# Altium PCB PCB2.PcbDoc
Units mm, origin at the board's own origin, x right, y up, seen from the top; angles counter-clockwise.
Board outline 26.67 x 61.52 mm, 2 copper layers (Top Layer, Bottom Layer); 24 components, 27 nets, 97 pads, 6 vias.
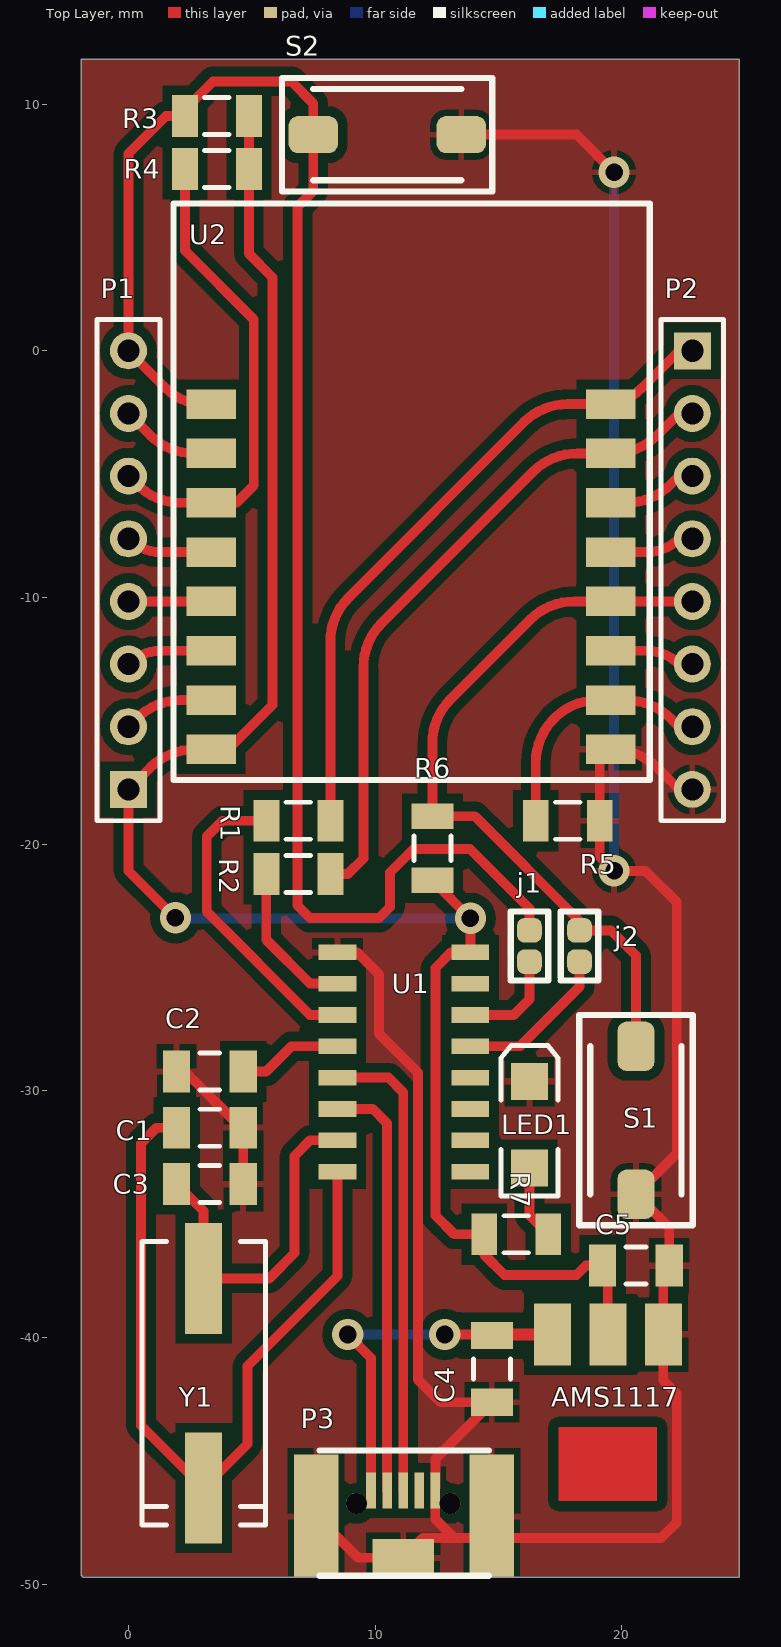
[diagram p0: Top Layer view]
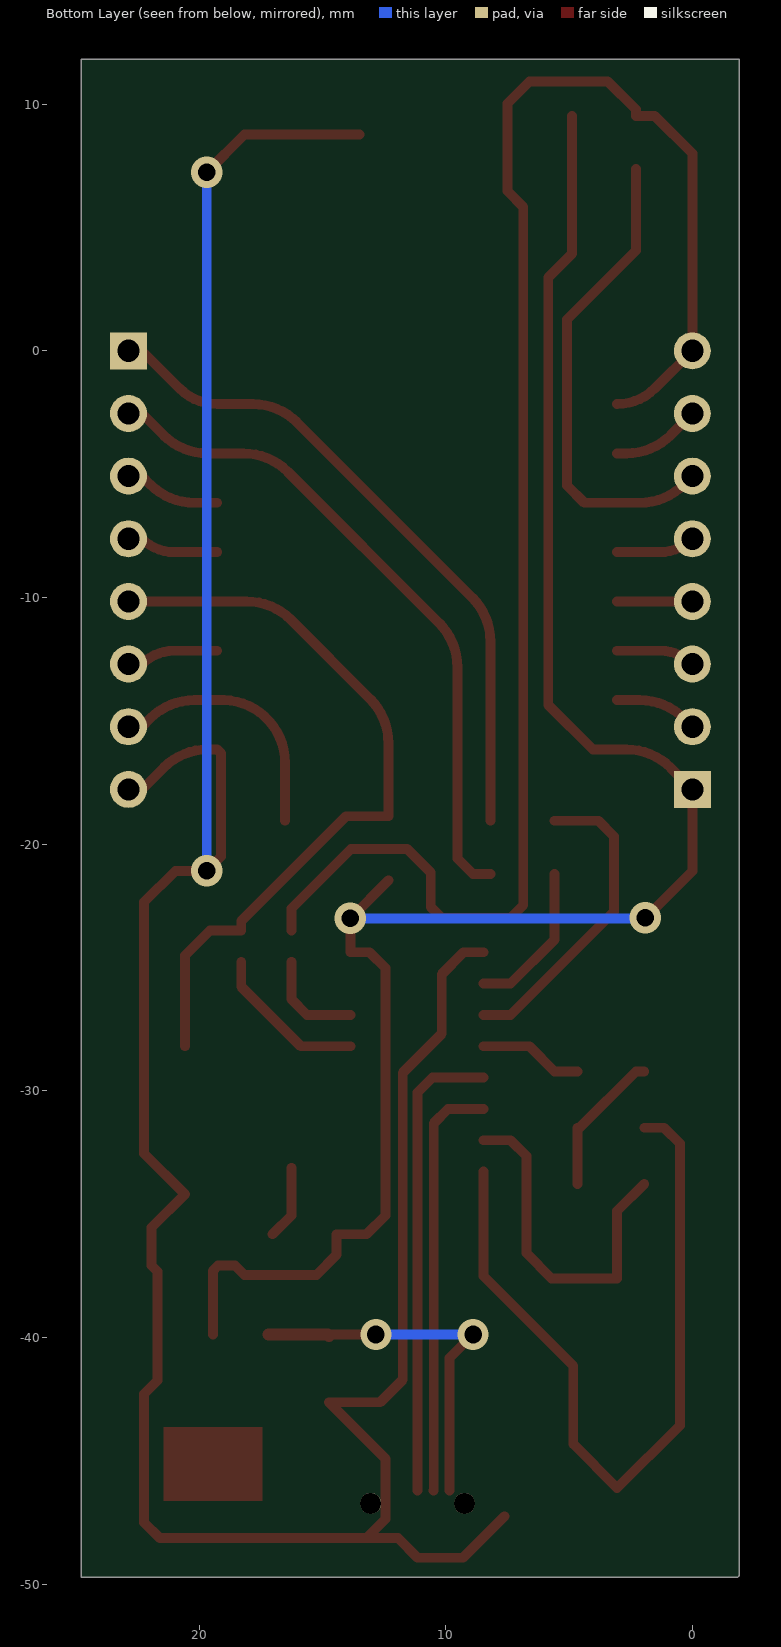
[diagram p1: Bottom Layer view, seen from below]

## Layer stack, top to bottom
Top Solder: solder mask 0.0102, Solder Resist, Dk 3.5
Top Layer: signal copper 0.0356
Dielectric 1: dielectric 0.32, FR-4, Dk 4.8
Bottom Layer: signal copper 0.0356
Bottom Solder: solder mask 0.0102, Solder Resist, Dk 3.5

## Board outline
-1.849,-49.713 -1.905,-49.657 -1.905,11.811 24.765,11.811 24.765,-49.713

## Design rules (kind name [scope] priority, off if disabled: settings)
Clearance [All] p1: gap=0.4 ignorepadtopadclearanceinfootprint=FALSE
PolygonConnect [All] p1: connectstyle=Relief reliefconductorwidth=0.254 reliefentries=4 polygonreliefangle="90 Angle" airgapwidth=0.254
RoutingVias [All] p1: holewidth=0.711 width=1.27 viastyle="Through Hole" minholewidth=0.711 minwidth=1.27 maxholewidth=0.711 maxwidth=1.27
SolderMaskExpansion [All] p1: expansion=0.102
Width [All] p1: maxlimit=3 minlimit=0.254 preferedwidth=1.5
30 further rules are at their usual default settings.

## Components (designator, comment, footprint, x,y, rotation, side; value= is the part's Value field where it differs from the comment)
AMS1117 "AMS1117" SOT-223-3 22.681,-39.128 r180 top
C1 "Cap Semi" C1206 3.302,-31.496 r180 top value=22pF
C2 "Cap Semi" C1206 3.302,-29.21 r0 top value=22pF
C3 "Cap Semi" C1206 3.302,-33.782 r180 top value=22pF
C4 "Cap Semi" C1206 14.732,-41.275 r90 top value=22pF
C5 "Cap Semi" C1206 20.574,-37.084 r180 top value=22pF
j1 "j1" jmp 16.256,-24.765 r90 top
j2 "j1" jmp 18.288,-24.765 r90 top
LED1 "Red" "LED SMD 1206" 16.256,-31.369 r90 top
P1 "Header 8" HDR1X8 0,-17.78 r90 top
P2 "Header 8" HDR1X8 22.86,0 r270 top
P3 "USB mini" microUSB 12.192,-48.133 r0 top
R1 "1K" "RES 1206 (3216X08L)" 5.588,-19.05 r0 top
R2 "1K" "RES 1206 (3216X08L)" 5.588,-21.209 r0 top
R3 "1K" "RES 1206 (3216X08L)" 4.882,9.525 r180 top
R4 "1K" "RES 1206 (3216X08L)" 4.882,7.366 r180 top
R5 "1K" "RES 1206 (3216X08L)" 19.106,-19.05 r180 top
R6 "1K" "RES 1206 (3216X08L)" 12.319,-18.867 r270 top
R7 "1K" "RES 1206 (3216X08L)" 17.018,-35.814 r180 top
S1 "Flash" 3*6*2.5BTN 20.574,-31.115 r270 top
S2 "Flash" 3*6*2.5BTN 10.414,8.763 r0 top
U1 "CH340G" sop16 11.158,-29.21 r0 top
U2 "ESP8266_ESP-12" ESP-12s 11.984,-3.554 r0 top
Y1 "12MHz" "Crystal SMD" 3.048,-42.418 r90 top

## Footprints (in the part's own frame and the unit in brackets; to place one, negate y for a bottom-side part, rotate by r counter-clockwise, add the part's x,y. Pads: shape width x height; smd on the part's side, far side on the other; paste and mask are expansions set on the pad)
3*6*2.5BTN [mm]
  rrect50% 2x1.5 smd: 1(-2.921,0) 2(3.079,0)
  silkscreen extent -4.19,-2.3 4.33,2.3
C1206 [mm] "Chip Capacitor, Body 3.2x1.6mm, IPC High Density"
  rect 1.1x1.7 smd: 1(-1.35,0) 2(1.35,0)
  silkscreen extent -0.4,-0.75 0.4,0.75, body extent -1.7,-0.9 1.7,0.9, height 1.3
"Crystal SMD" [mm]
  rect 4.5x1.5 smd: 1(-3.683,0) 2(4.817,0)
  silkscreen extent -5.18,-2.5 6.32,2.5, body extent -5.64,-2.25 6.66,2.25, height 5.18
ESP-12s [mm]
  rect 2x1.2 smd: 1(7.574,-12.605) 2(7.574,-10.605) 3(7.574,-8.605) 4(7.574,-6.605) 5(7.574,-4.605) 6(7.574,-2.605) 7(7.574,-0.605) 8(7.574,1.395) 9(-8.626,1.395) 10(-8.626,-0.605) 11(-8.626,-2.605) 12(-8.626,-4.605) 13(-8.626,-6.605) 14(-8.626,-8.605) 15(-8.626,-10.605) 16(-8.626,-12.605)
  silkscreen extent -10.16,-13.84 9.14,9.53
HDR1X8 [mm] "Connector; Header; 8 Position"
  rect 1.5x1.5 hole 0.9: 1(0,0)
  round 1.5 hole 0.9: 2(2.54,0) 3(5.08,0) 4(7.62,0) 5(10.16,0) 6(12.7,0) 7(15.24,0) 8(17.78,0)
  silkscreen extent -1.27,-1.27 19.05,1.27
jmp [mm]
  rrect60% 1x1 smd: 1(0,0) 2(1.27,0)
  silkscreen extent -0.76,-0.76 2.03,0.76
"LED SMD 1206" [mm]
  rect 1.5x1.5 smd: 1(-1.75,0) 2(1.75,0)
  silkscreen extent -2.9,-1.15 3.2,1.15, body extent -1.65,-0.76 1.65,0.69, height 1.36
microUSB [mil]
  round 33.46 hole 33.46 unplated: 0(-116.26,55.39) 0(33.34,55.39)
  rect 15.75x57.09 smd: 1(-92.64,76.06) 2(-67.05,76.06) 3(-41.46,76.06) 4(-15.87,76.06) 5(9.72,76.06)
  rect 70.87x196.85 smd paste+0 mask+0: 6(-180,35) 7(100,35)
  rect 98.43x59.06 smd paste+0 mask+0: 8(-41.46,-31.22)
  silkscreen extent -175,-60 95,140
"RES 1206 (3216X08L)" [mm] "Chip Resistor, 2-Leads, Body 3.2x1.6mm, IPC High Density _ (0.125 W)"
  rect 1.05x1.7 smd: 1(0,0) 2(2.596,0)
  silkscreen extent 0.8,-0.75 1.8,0.75, body extent -0.23,-0.76 2.82,0.76, height 0.6
sop16 [mil]
  rect 60x25 smd: 1(-105.71,190) 2(-105.71,140) 3(-105.71,90) 4(-105.71,40) 5(-105.71,-10) 6(-105.71,-60) 7(-105.71,-110) 8(-105.71,-160) 9(106.49,-160) 10(106.49,-110) 11(106.49,-60) 12(106.49,-10) 13(106.49,40) 14(106.49,90) 15(106.49,140) 16(106.49,190)
SOT-223-3 [mm]
  rect 1.5x2.5 smd: 1(1,0.75) 2(3.25,0.75) 3(5.5,0.75)
  Top Layer region: 1.25,4.5 5.25,4.5 5.25,7.5 1.25,7.5
  body extent -0.1,-0.22 6.6,7.08, height 1.8

## Part data
AMS1117: "LDO 3.3V/5V/12V"
C1 C2 C3 C4 C5: "Capacitor (Semiconductor SIM Model)", LatestRevisionDate=29-May-2009, LatestRevisionNote="IPC-7351 Footprint Added.", PackageDescription="Chip Capacitor", PackageReference=C1206, Published=8-Jun-2000, Publisher="Altium Limited"
j1 j2: library part SJ, "SMD solder JUMPER", DeviceSetName=SJ, GateName_1=1, LibraryName=jumper, SymbolName_1=SJ
LED1: library part LED, "LED", Adding Date=1387/12/22, Color=Red, Designer="Saeid Jorablo", Organazation=ControTec, Size="SMD 1206"
P1 P2: "Header, 8-Pin", LatestRevisionDate=17-Jul-2002, LatestRevisionNote="Re-released for DXP Platform.", Publisher="Altium Limited"
P3: "mini USB Connector"
R1 R2 R3 R4 R5 R6 R7: library part Resistor, "Resistor", Power="1/8 W", Tolerance=5%
S1 S2: library part "Switch PB", "Push Button Switch"
Y1: library part XTAL, "XTAL Crystal", Company=E.P.I.L, Design Date=11/04/2011
U1: CH340G=CH340G, DeviceSetName=CH340G, GateName_1=G$1, LibraryName=usb-serial, SymbolName_1=CH340G
U2: DeviceSetName=ESP8266_ESP-12, ESP8266_ESP-12=ESP8266_ESP-12, GateName_1=G$1, LibraryName=ESP8266-ESP12, SymbolName_1=ESP12

## Via types
v1: diameter 1.27, hole 0.711, Top Layer to Bottom Layer, tented both sides, 6 vias

## Nets (pads, with @x,y where several pads share a name; then routed paths per layer and width w, separated by ;. In a path a pad name is that pad's centre, name@x,y a point inside that pad or via, vN(x,y) a via of type N, cw(c..) or ccw(c..) an arc to the next point about the centre after c; other vN are vias at no path point)
GND: AMS1117.1 C1.1 C2.1 C3.1 C4.1 C5.1 LED1.2 P2.8 P3.5 P3.6 P3.7 P3.8 R5.1 S1.2 S2.2 U1.1 U2.1 | length 124.8
  Top Layer w0.4: C2.1 2.286,-29.21 4.572,-31.496 C1.1 C3.1 ; P3.6 9.302,-48.926 P3.8 11.932,-48.133 13.208,-48.133 ; U1.1 9.271,-24.384 10.16,-25.273 10.16,-27.686 11.739,-29.265 11.739,-41.711 12.653,-42.625 C4.1 12.443,-44.914 P3.5@12.443,-46.079 ; P3.5 12.439,-47.364 13.208,-48.133 ; S2.2 18.161,8.763 v1(19.685,7.239) ; P2.8@22.317,-17.78 21.442,-16.905 ccw(c19.646,-18.701) 19.646,-16.161 19.258,-16.161 19.106,-16.313 R5.1 19.106,-20.503 v1(19.685,-21.082) 20.955,-21.082 22.225,-22.352 22.225,-32.543 S1.2 21.924,-35.544 C5.1 21.681,-37.327 AMS1117.1 21.681,-41.747 22.225,-42.291 22.225,-47.498 21.59,-48.133 13.208,-48.133
  Bottom Layer w0.4: v1(19.685,-21.082) v1(19.685,7.239)
NetAMS1117_3: AMS1117.3 C4.2 P3.1 | length 15
  Top Layer w0.4: v1(8.89,-39.878) 9.839,-40.827 P3.1 ; v1(12.827,-39.878) 14.685,-39.878 C4.2
  Top Layer w0.5: C4.2 14.779,-39.878 AMS1117.3
  Bottom Layer w0.4: v1(8.89,-39.878) v1(12.827,-39.878)
NetC1_2: C1.2 U1.8 Y1.1 | length 31.8
  Top Layer w0.4: C1.2 1.143,-31.496 0.508,-32.131 0.508,-43.561 Y1.1 4.826,-44.323 4.826,-41.148 8.473,-37.501 U1.8
NetC2_2: C2.2 U1.4 | length 4.2
  Top Layer w0.4: C2.2 5.588,-29.21 6.604,-28.194 U1.4
NetC3_2: C3.2 U1.7 Y1.2 | length 14.3
  Top Layer w0.4: C3.2 3.048,-34.878 Y1.2 5.706,-37.601 6.731,-36.576 6.731,-32.639 7.366,-32.004 U1.7
Netj1_1: j1.1 U1.14 | length 4.2
  Top Layer w0.4: U1.14 15.621,-26.924 16.256,-26.289 j1.1
Netj1_2: j1.2 P1.8 R3.2 S2.1 U2.9 | length 67.3
  Top Layer w0.4: U2.9@3.058,-2.161 cw(c3.058,0.004) 1.527,-1.527 P1.8 0,8.001 1.524,9.525 R3.2 2.286,9.779 3.429,10.922 6.604,10.922 7.493,10.033 S2.1 7.493,6.477 6.858,5.842 6.858,-22.479 7.366,-22.987 10.16,-22.987 10.604,-22.543 10.604,-21.145 11.557,-20.193 13.843,-20.193 16.256,-22.606 j1.2
Netj2_1: j2.1 U1.13 | length 6.4
  Top Layer w0.4: U1.13 15.875,-28.194 18.288,-25.781 j2.1
Netj2_2: j2.2 P2.5 R6.1 S1.1 U2.4 | length 30.2
  Top Layer w0.4: S1.1 20.574,-24.511 19.558,-23.495 j2.2 18.288,-23.114 14.041,-18.867 R6.1 12.319,-15.911 cw(c14.859,-15.911) 13.063,-14.115 16.274,-10.904 cw(c18.07,-12.7) 18.07,-10.16 P2.5@22.317,-10.16
NetLED1_1: LED1.1 R7.1 | length 3
  Top Layer w0.4: LED1.1 16.256,-35.052 R7.1
NetP1_2: P1.2 U2.15 | length 3.4
  Top Layer w0.4: P1.2 0.335,-14.905 cw(c2.131,-16.701) 2.131,-14.161 U2.15@3.058,-14.161
NetP1_3: P1.3 U2.14 | length 3.2
  Top Layer w0.4: P1.3 cw(c1.301,-14.001) 1.301,-12.161 U2.14@3.058,-12.161
NetP1_4: P1.4 U2.13 | length 3.1
  Top Layer w0.4: P1.4 P1.4 U2.13@3.058,-10.161
NetP1_5: P1.5 U2.12 | length 3.2
  Top Layer w0.4: P1.5 ccw(c1.306,-6.314) 1.306,-8.161 U2.12@3.058,-8.161
NetP1_6: P1.6 R4.2 U2.11 | length 19.7
  Top Layer w0.4: P1.6 0.337,-5.417 ccw(c2.133,-3.621) 2.133,-6.161 U2.11@3.058,-6.161 ; R4.2 2.286,4.064 5.08,1.27 5.08,-5.461 4.381,-6.16 U2.11@3.048,-6.16
NetP1_7: P1.7 U2.10 | length 3.6
  Top Layer w0.4: P1.7 0.877,-3.417 ccw(c2.673,-1.621) 2.673,-4.161 U2.10@3.058,-4.161
NetP2_1: P2.1 R1.2 U2.8 | length 26.6
  Top Layer w0.4: R1.2 8.184,-11.792 cw(c10.724,-11.792) 8.928,-9.996 16.02,-2.904 cw(c17.816,-4.7) 17.816,-2.16 U2.8@19.248,-2.16 ; U2.8@19.258,-2.161 ccw(c19.258,0.007) 20.791,-1.526 P2.1@22.317,0
NetP2_2: P2.2 R2.2 U2.7 | length 26.7
  Top Layer w0.4: R2.2 8.89,-21.209 9.525,-20.574 9.525,-12.832 cw(c12.065,-12.832) 10.269,-11.036 16.401,-4.904 cw(c18.197,-6.7) 18.197,-4.16 U2.7@19.248,-4.16 ; U2.7@19.258,-4.161 19.644,-4.161 ccw(c19.644,-1.621) 21.44,-3.417 P2.2@22.317,-2.54
NetP2_3: P2.3 U2.6 | length 3.4
  Top Layer w0.4: U2.6@19.258,-6.161 20.184,-6.161 ccw(c20.184,-3.621) 21.98,-5.417 P2.3@22.317,-5.08
NetP2_4: P2.4 U2.5 | length 3.2
  Top Layer w0.4: U2.5@19.258,-8.161 21.011,-8.161 ccw(c21.011,-6.314) P2.4@22.317,-7.62
NetP2_6: P2.6 U2.3 | length 3.2
  Top Layer w0.4: U2.3@19.258,-12.161 21.016,-12.161 cw(c21.016,-14.001) P2.6@22.317,-12.7
NetP2_7: P2.7 R5.2 U2.2 | length 10.2
  Top Layer w0.4: R5.2 16.51,-16.7 cw(c19.05,-16.7) U2.2@18.978,-14.161 ; U2.2@19.248,-14.16 19.05,-14.16 ccw(c19.05,-16.7) U2.2@18.978,-14.161 ; P2.7@22.317,-15.24 21.982,-14.905 ccw(c20.186,-16.701) 20.186,-14.161 U2.2@18.978,-14.161
NetP3_2: P3.2 U1.6 | length 17.1
  Top Layer w0.4: U1.6 9.906,-30.734 10.485,-31.313 10.485,-46.197 P3.2
NetP3_3: P3.3 U1.5 | length 19.1
  Top Layer w0.4: U1.5 10.541,-29.464 11.139,-30.062 P3.3
NetR1_1: R1.1 U1.3 | length 12.8
  Top Layer w0.4: R1.1 3.81,-19.05 3.175,-19.685 3.175,-22.733 7.366,-26.924 U1.3
NetR2_1: R2.1 U1.2 | length 6.3
  Top Layer w0.4: R2.1 5.588,-23.876 7.366,-25.654 U1.2
VCC: AMS1117.2 C5.2 P1.1 R3.1 R4.1 R6.2 R7.2 U1.16 U2.16 | length 76
  Top Layer w0.4: v1(1.905,-22.987) 0,-21.082 P1.1 0.875,-16.905 cw(c2.671,-18.701) 2.671,-16.161 4.032,-16.161 5.842,-14.351 5.842,2.977 4.882,3.937 R4.1 R3.1 ; R6.2 v1(13.863,-23.007) U1.16 13.081,-24.384 12.446,-25.019 12.446,-35.052 13.208,-35.814 R7.2 14.422,-36.647 15.24,-37.465 18.161,-37.465 18.542,-37.084 C5.2 19.431,-37.291 AMS1117.2
  Bottom Layer w0.4: v1(1.905,-22.987) 1.925,-23.007 v1(13.863,-23.007)
pads on no net: P3.0 P3.4 U1.9 U1.10 U1.11 U1.12 U1.15

## Polygon pours and split planes (outlines as drawn)
GND on Top Layer "Top Layer-GND" (solid, pour order 0): 24.765,11.811 -1.905,11.811 -1.905,-49.657 24.765,-49.657

## Silkscreen, mask and mechanical layers (free items; w line width, h text height)
Mechanical 1:
  the board outline again, w0.254